# Allegro board PWM-CIRCUIT.brd
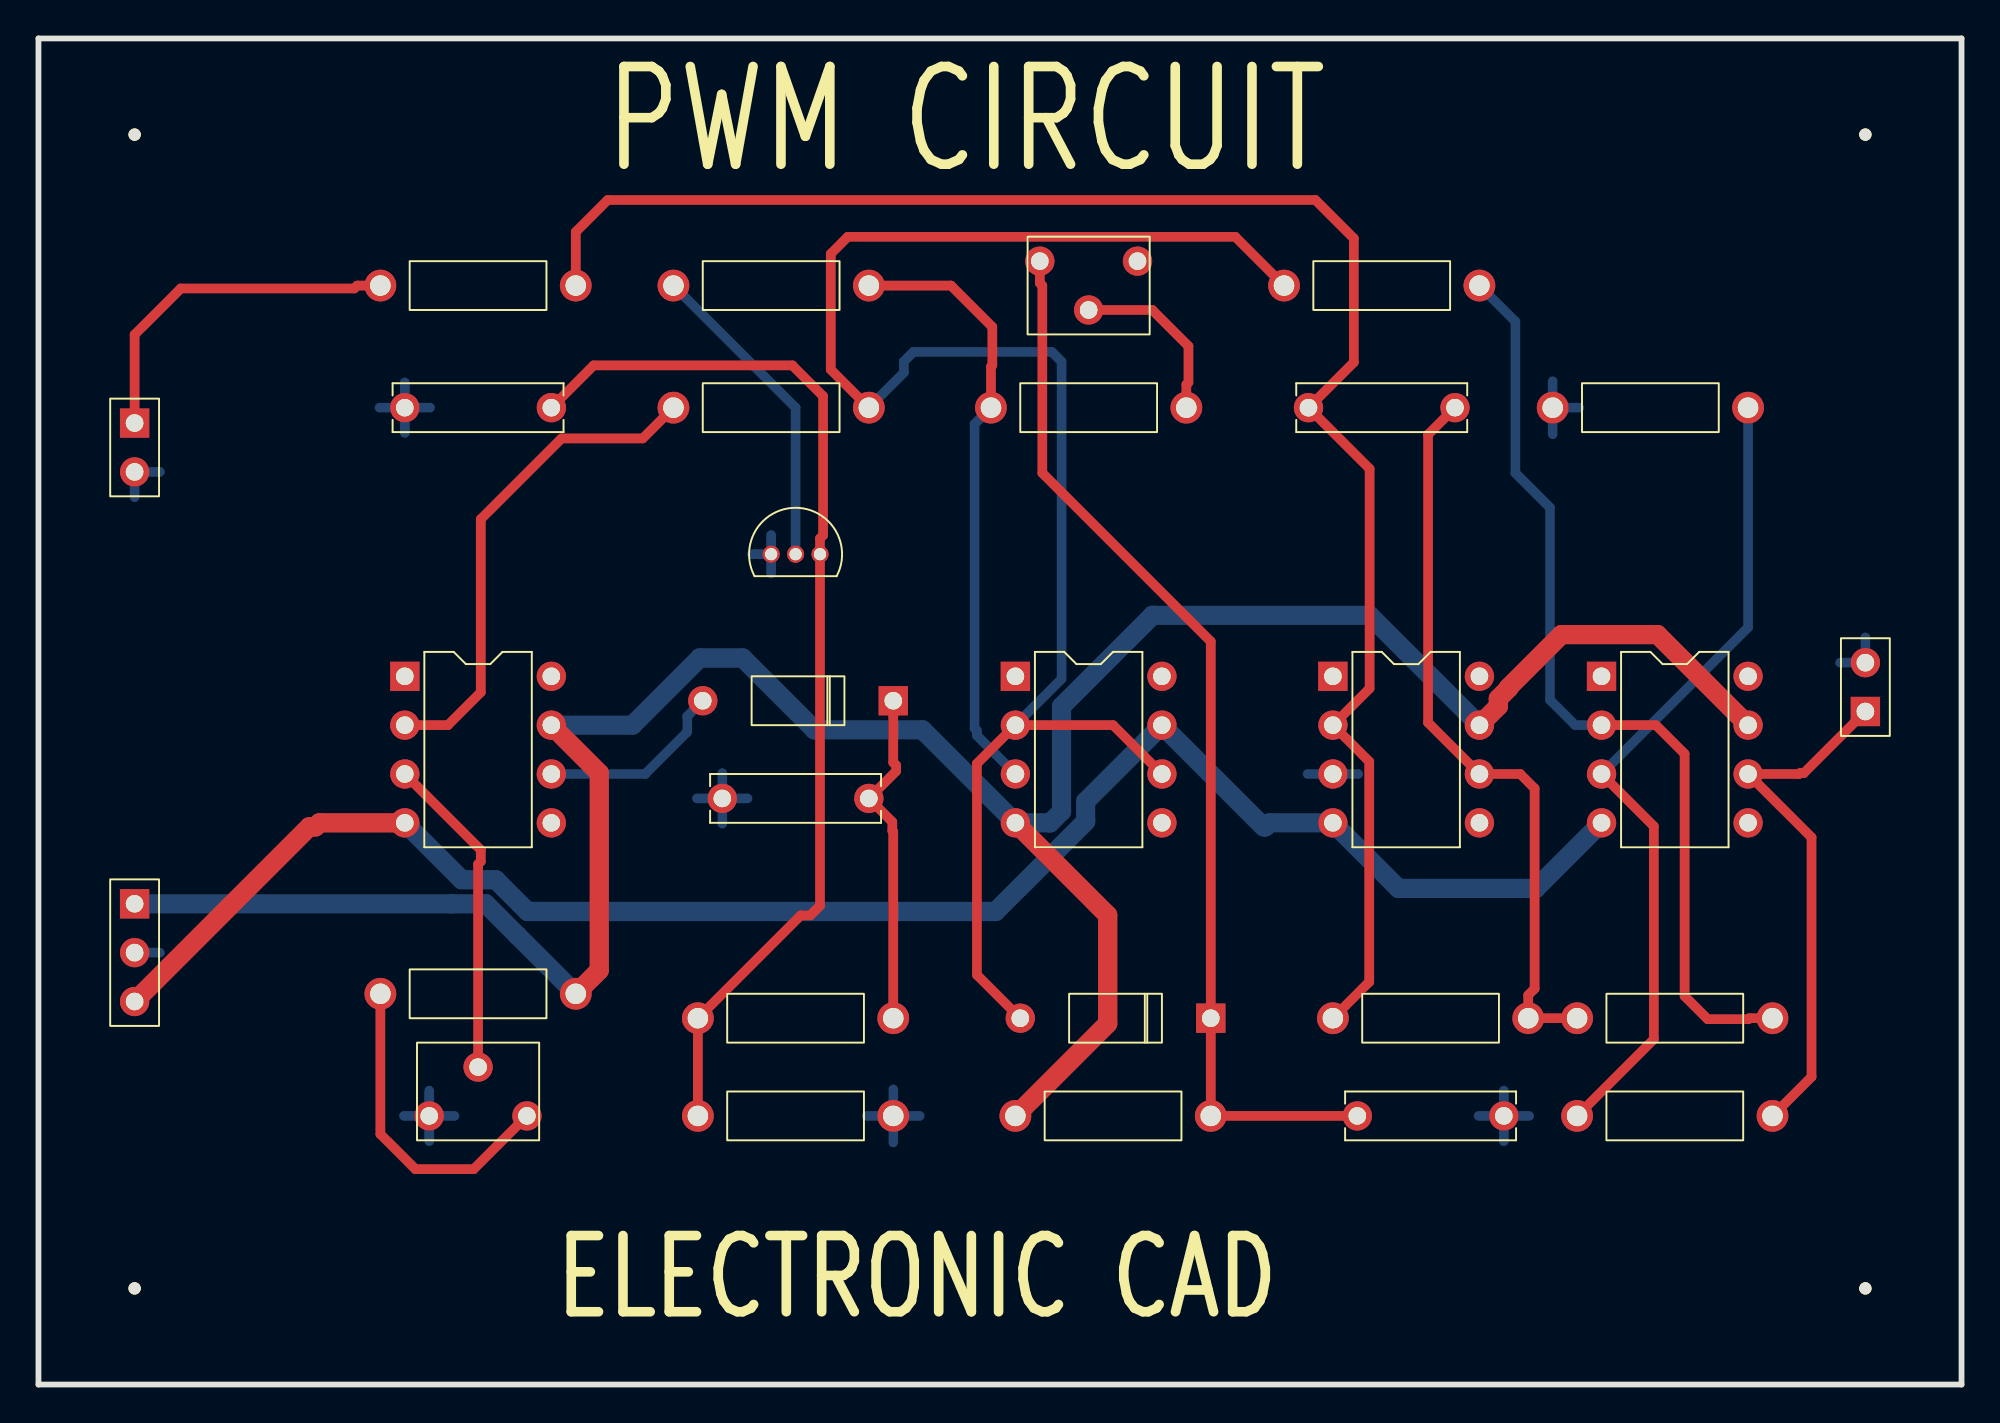
[diagram p0: board, top side]
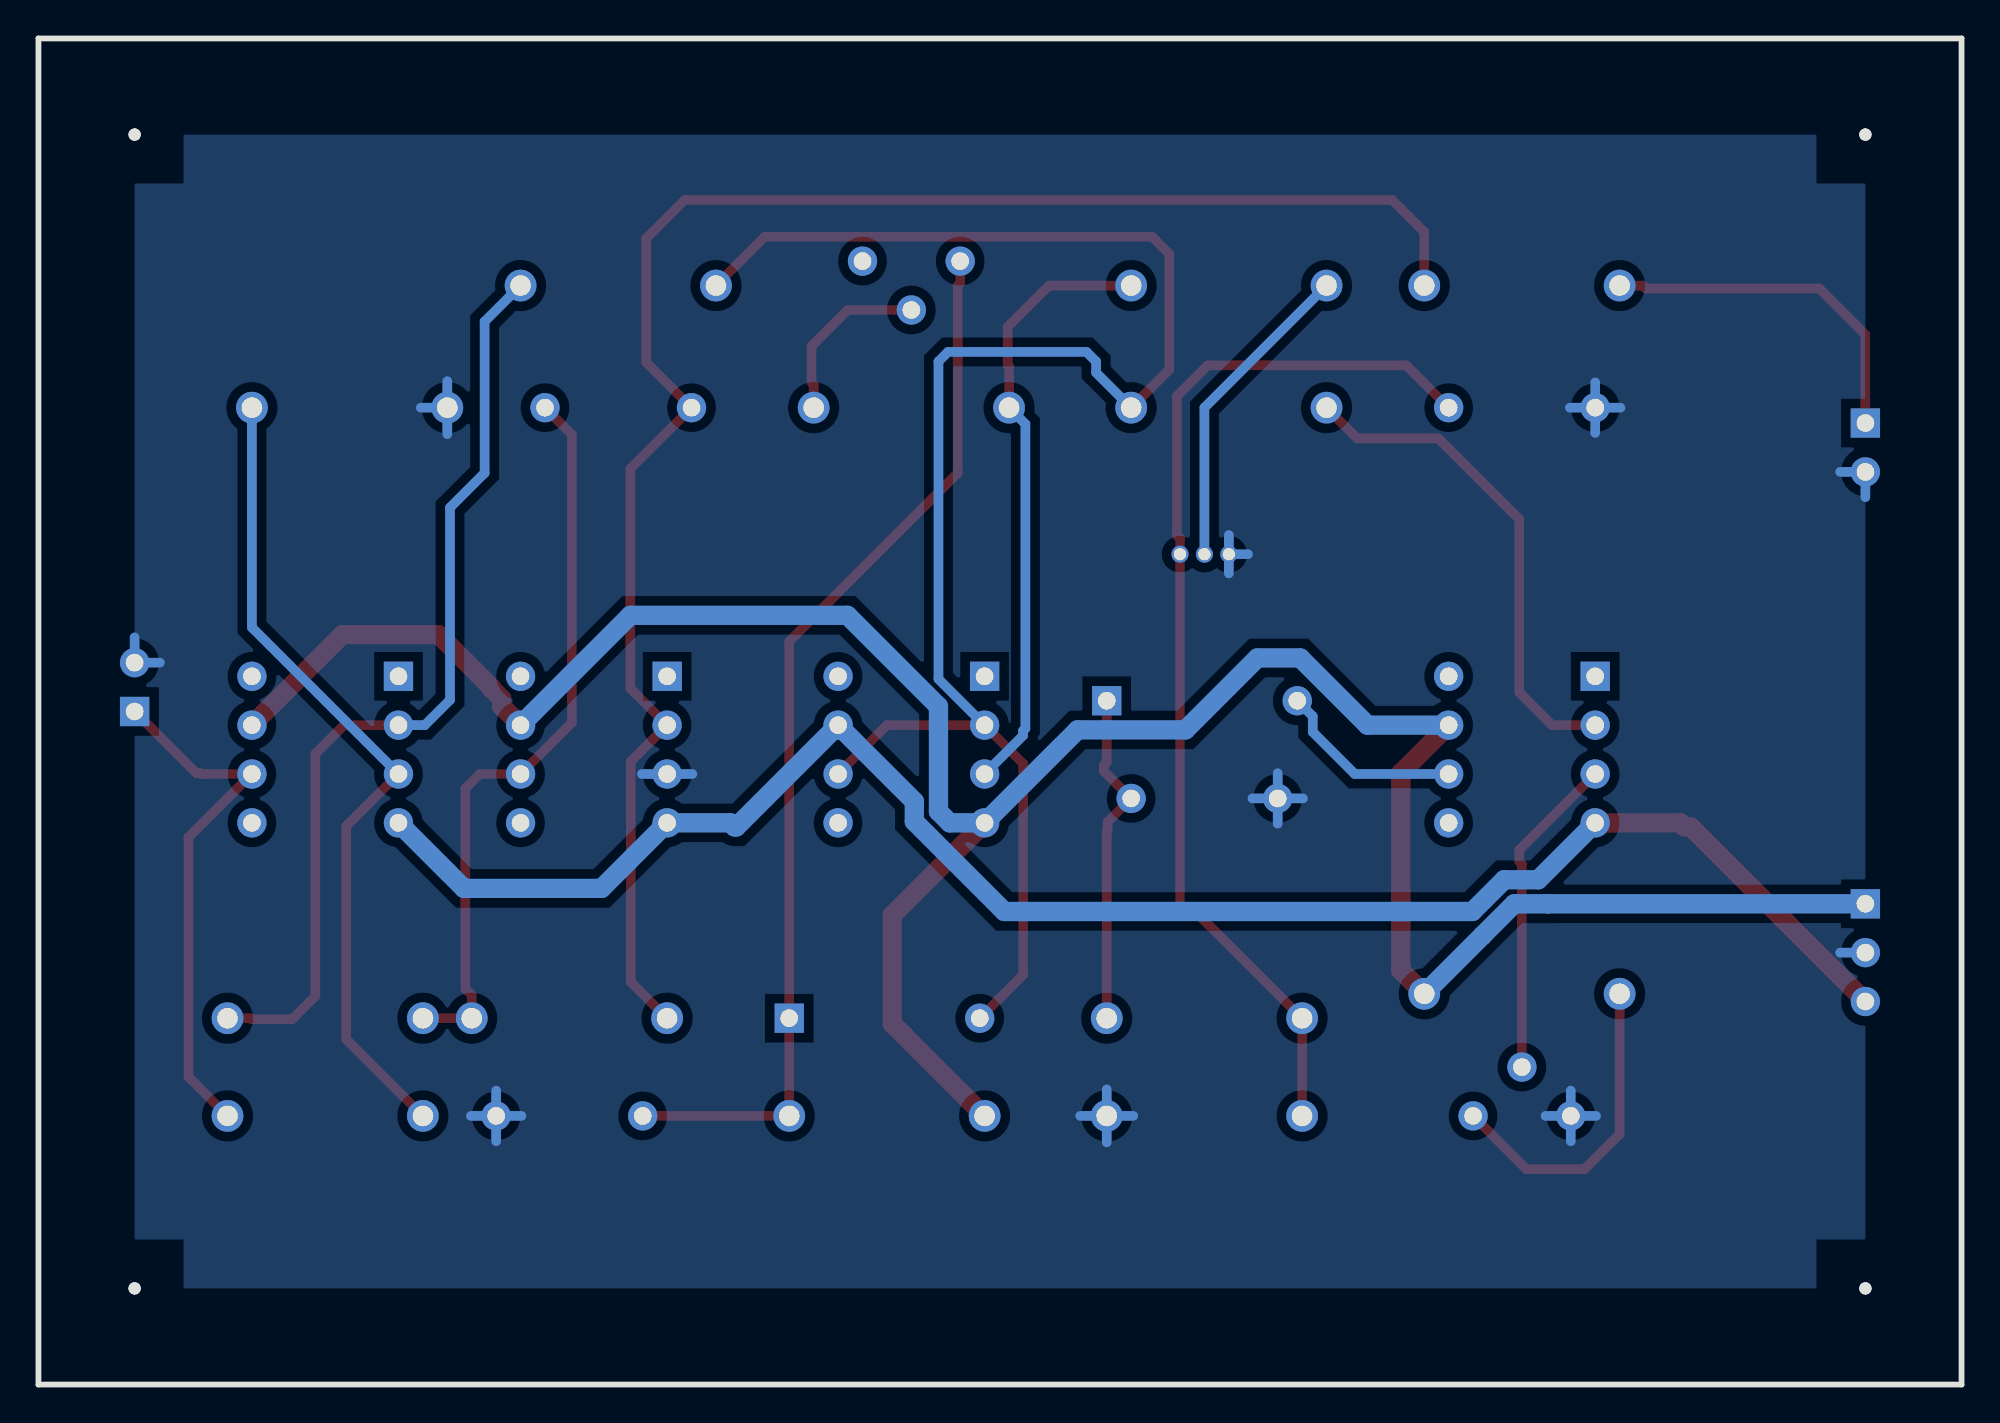
[diagram p1: board, bottom side, seen from below]

Outline 100 x 70 mm; copper layers: TOP, BOTTOM. Coordinates in mm from the lower left corner of the outline.
Outline path: 0,70 0,0 100,0 100,70 0,70

## Design rules (mm)
nets with their own width: min track width 1; nets +12V -12V GND

## Placement (name value [footprint] x y rotation side)
C1  0.001uF  [CAP300]  66.04 50.8 0 top
C2  0.001uF  [CAP300]  76.2 13.97 180 top
C3  0.0033uF  [CAP300]  19.05 50.8 0 top
C4  0.1uF  [CAP300]  35.56 30.48 0 top
D1  ZD5.1V  [DO41]  60.96 19.05 90 top
D2  1S1588  [DO41]  44.45 35.56 90 top
J1  CON2  [JUMPER2]  5 50 270 top
J2  CON2  [JUMPER2]  95 35 90 top
J3  CON3  [JUMPER3]  5 25 270 top
NOREF  -  []  95 5 90 top
NOREF#2  -  [unnamed#2]  95 5 0 top
NOREF#3  -  []  5 25 90 top
NOREF#4  -  [unnamed#2]  5 5 0 top
NOREF#5  -  []  95 65 0 top
NOREF#6  -  [unnamed#2]  5 65 0 top
NOREF#7  -  [unnamed#2]  95 65 0 top
NOREF#8  -  []  5 65 90 top
NOREF#9  -  []  5 65 0 top
NOREF#10  -  []  5 50 90 top
NOREF#11  -  []  5 5 90 top
NOREF#12  -  []  0 66.04 0 top
NOREF#13  -  []  96.52 0 90 top
NOREF#14  -  []  0 0 90 top
NOREF#15  -  []  3.81 0 90 top
NOREF#16  -  []  0 70 0 top
Q1  2SC1815  [TO92]  38.1 43.18 90 top
R1  100K  [RES400]  17.78 57.15 270 top
R2  3.3K  [RES400]  50.8 13.97 270 top
R3  1M  [RES400]  74.93 57.15 90 top
R4  10K  [RES400]  67.31 19.05 270 top
R5  10K  [RES400]  59.69 50.8 90 top
R6  1  [RES400]  33.02 57.15 270 top
R7  10K  [RES400]  33.02 50.8 270 top
R8  10K  [RES400]  90.17 19.05 90 top
R9  3.9K  [RES400]  17.78 20.32 270 top
R10  RESISTOR  [RES400]  44.45 19.05 90 top
R11  10K  [RES400]  90.17 13.97 90 top
R12  4.7K  [RES400]  34.29 13.97 270 top
R13  470  [RES400]  88.9 50.8 90 top
U1  LF356  [DIP8_3]  50.8 36.83 0 top
U2  LF356  [DIP8_3]  67.31 36.83 0 top
U3  LF356  [DIP8_3]  81.28 36.83 0 top
U4  LF356  [DIP8_3]  19.05 36.83 0 top
VR1  1M  [RESADJ]  52.07 58.42 90 top
VR2  10K  [RESADJ]  25.4 13.97 270 top

## Library data of the parts
C1-C4 = CAP NP: Tolerance: ***; User Part Number: ***
D1 = DIODE ZENER
D2 = DIODE
J1 J2 = CON2: User Part Number: ***
J3 = CON3: User Part Number: ***
Q1 = NPN ECB
R1-R13 = RESISTOR: Tolerance: ***; User Part Number: ***
U1 = LF356_1: Tolerance: ***; User Part Number: ***
U2-U4 = LF356_0: Tolerance: ***; User Part Number: ***
VR1 = RESISTOR VAR 2: Tolerance: ***; User Part Number: ***
VR2 = RESISTOR VAR: Tolerance: ***; User Part Number: ***

## Footprints (pads in the part's own frame, mm; a bottom-side part is the same pattern mirrored in y, then rotated)
CAP300
  round 1.524 hole 0.914: 1(0,0) 2(7.62,0)
DIP8_3
  rect 1.524x1.524 hole 0.914: 1(0,0)
  round 1.524 hole 0.914: 2(0,-2.54) 3(0,-5.08) 4(0,-7.62) 5(7.62,-7.62) 6(7.62,-5.08) 7(7.62,-2.54) 8(7.62,0)
DO41
  rect 1.524x1.524 hole 0.914: 1(0,0)
  round 1.524 hole 0.914: 2(0,9.906)
JUMPER2
  rect 1.524x1.524 hole 0.914: 1(0,0)
  round 1.524 hole 0.914: 2(2.54,0)
JUMPER3
  rect 1.524x1.524 hole 0.914: 1(0,0)
  round 1.524 hole 0.914: 2(2.54,0) 3(5.08,0)
RES400
  round 1.651 hole 1.067: 1(0,0) 2(0,10.16)
RESADJ
  round 1.524 hole 0.914: 1(0,0) 2(-2.54,-2.54) 3(0,-5.08)
TO92
  round 0.889 hole 0.635: 1(0,0) 2(0,-1.27) 3(0,-2.54)
unnamed#2
  round 0.635 hole 3.175 unplated: (0,0)

## Nets
+12V: J3.1 R2.1 R9.2 U1.4(V-) U2.7(V+) U3.7(V+) U4.7(V+)
-12V: J3.3 U1.7(V+) U2.4(V-) U3.4(V-) U4.4(V-)
GND: C2.1 C3.1 C4.1 J1.2 J2.2 J3.2 Q1.1(E) R12.2 R13.2 U2.3(+IN) VR2.3(B)
A1: D1.2(ANODE) R3.2 R7.2 U1.2(-IN) U1.6(OUT)
B1: C1.1 R1.2 R4.1 U2.2(-IN)
OUT: J2.1 R11.1 U3.6(OUT)
N00905: U4.3(+IN) VR2.2(WIPER)
N00909: R9.1 VR2.1(A)
N01168: J1.1 R1.1
N01210: R7.1 U4.2(-IN)
N01226: D2.2(A) U4.6(OUT)
N01236: C4.2 D2.1(K) R10.1
N01273: C3.2 Q1.3(B) R10.2 R12.1
N01367: R11.2 R13.1 U3.3(+IN)
N01391: C2.2 D1.1(CATHODE) R2.2 VR1.1
N01415: R5.2 R6.2 U1.3(+IN)
N01426: R3.1 R8.1 U3.2(-IN)
N01469: R5.1 VR1.2
N01710: C1.2 R4.2 R8.2 U2.6(OUT)
N02797: Q1.2(C) R6.1

Pads without a net: U1 1 5 8; U2 1 5 8; U3 1 5 8; U4 1 5 8; VR1 3

## Routing (per net, layer and track width the routed paths; a pad name or vN(x,y) marks a point on that pad's centre or on a via; arc(x,y) is an arc through that point)
+12V: length 141
  TOP w1: U3.7 84.19,39 79.2,39 76.45,36.25 76.45,36.2 75.91,35.67 75.91,35.27 U2.7 ; R9.2 29.16,21.54 29.16,31.8 U4.7 ; U1.4 55.6,24.41 55.6,18.77 R2.1
  BOTTOM w1: U2.7 69.22,40 57.93,40 53.2,35.27 53.2,29.8 52.61,29.21 U1.4 45.97,34.04 40.36,34.04 36.62,37.78 34.38,37.78 30.89,34.29 U4.7 ; R9.2 24.91,23.35 24.91,23.35 23.26,25 21.49,25 21.49,25 J3.1
-12V: length 91.8
  TOP w1: U4.4 14.61,29.21 14.4,29 14.08,29 J3.3
  BOTTOM w1: U4.4 22.01,26.25 23.78,26.25 25.43,24.6 49.77,24.6 54.45,29.28 54.45,30.32 U1.7 63.71,29 63.8,29 64.01,29.21 U2.4 70.72,25.8 77.87,25.8 U3.4
GND: length 42.9
  BOTTOM w0.5: 17.73,50.8 C3.1 ; C3.1 20.36,50.8 ; C3.1 19.05,52.12 ; C3.1 19.05,49.48 ; 43.07,13.97 R12.2 ; R12.2 45.83,13.97 ; R12.2 44.45,15.35 ; R12.2 44.45,12.59 ; 95,38.85 J2.2 93.69,37.54 ; 6.32,47.46 J1.2 5,46.15 ; VR2.3 20.32,15.29 ; VR2.3 20.32,12.65 ; VR2.3 19,13.97 ; VR2.3 21.64,13.97 ; C2.1 76.2,15.29 ; C2.1 74.89,13.97 ; C2.1 77.52,13.97 ; C2.1 76.2,12.65 ; Q1.1 38.1,44.18 ; Q1.1 38.1,42.18 ; Q1.1 37.1,43.18 ; C4.1 35.56,31.8 ; C4.1 35.56,29.16 ; C4.1 34.24,30.48 ; C4.1 36.88,30.48 ; R13.2 80.12,50.8 ; R13.2 78.74,52.18 ; R13.2 78.74,49.42 ; 68.62,31.75 U2.3 66,31.75 ; J3.2 6.32,22.46
A1: length 91.2
  TOP w0.5: D1.2 48.8,21.3 48.8,32.29 U1.2 55.88,34.29 U1.6 ; R7.2 41.2,52.78 41.2,58.8 42.09,59.69 62.23,59.69 R3.2
  BOTTOM w0.5: U1.2 53.2,36.69 53.2,53.2 52.7,53.7 45.5,53.7 45,53.2 45,52.62 R7.2
B1: length 90
  TOP w0.5: R1.2 27.94,59.94 29.6,61.6 66.4,61.6 68.4,59.6 68.4,53.16 C1.1 69.22,47.62 69.22,36.2 U2.2 69.2,32.4 69.2,20.94 R4.1
OUT: length 27.4
  TOP w0.5: R11.1 92.2,16 92.2,28.45 U3.6 91.55,31.75 91.6,31.8 91.8,31.8 J2.1
N00905: length 16.9
  TOP w0.5: VR2.2 22.86,27.06 23,27.2 23,27.8 U4.3
N00909: length 16.8
  TOP w0.5: VR2.1 22.63,11.2 19.6,11.2 17.78,13.02 R9.1
N01168: length 18.4
  TOP w0.5: R1.1 16.58,57.15 16.43,57 7.4,57 5,54.6 J1.1
N01210: length 26.1
  TOP w0.5: U4.2 21.29,34.29 23,36 23,45 27.2,49.2 31.42,49.2 R7.1
N01226: length 9.9
  BOTTOM w0.5: U4.6 31.55,31.75 33.74,33.94 33.74,34.75 D2.2
N01236: length 17.7
  TOP w0.5: D2.1 44.45,32.35 44.6,32.2 44.6,31.9 C4.2 44.4,29.26 44.4,28.8 44.45,28.75 R10.1
N01273: length 56.1
  TOP w0.5: R12.1 R10.2 39.64,24.4 40.14,24.4 40.64,24.9 Q1.3 40.64,44 40.8,44.16 40.8,51.4 39.2,53 28.87,53 C3.2
N01367: length 42.8
  TOP w0.5: U3.3 84,29.03 84,17.96 R11.2
  BOTTOM w0.5: U3.3 88.9,39.37 R13.1
N01391: length 55.8
  TOP w0.5: VR1.1 52.07,57.28 52.2,57.15 52.2,47.4 60.96,38.64 D1.1 R2.2 C2.2
N01415: length 31.8
  TOP w0.5: R5.2 49.53,52.93 49.6,53 49.6,55 47.45,57.15 R6.2
  BOTTOM w0.5: R5.2 48.68,49.95 48.68,34.12 48.8,34 48.8,33.75 U1.3
N01426: length 48.9
  TOP w0.5: U3.2 84.11,34.29 85.6,32.8 85.6,20.2 86.8,19 88.92,19 88.97,19.05 R8.1
  BOTTOM w0.5: R3.1 76.8,55.28 76.8,47.4 78.6,45.6 78.6,35.6 79.91,34.29 U3.2
N01469: length 9.2
  TOP w0.5: R5.1 59.69,52 59.8,52.11 59.8,54 57.92,55.88 VR1.2
N01710: length 38.5
  TOP w0.5: R8.2 R4.2 77.47,20.25 77.8,20.58 77.8,31 77.05,31.75 U2.6 72.26,34.42 72.26,49.4 C1.2
N02797: length 16.6
  BOTTOM w0.5: R6.1 39.37,50.8 Q1.2

## Copper pours and planes (outline as drawn; the poured copper is in the pictures)
GND on BOTTOM: 5,5 5,65 95,65 95,5 ; 2 cut-outs

## Text on the board
Ref Des/Silkscreen Top: ELECTRONIC CAD | PWM CIRCUIT
DIMENSION: FIGURE | SIZE | 0.635 | 0.914 | 1.067 | 3.175 | DRILL CHART: TOP to BOTTOM | ALL UNITS ARE IN MILLIMETERS | PLATED | NON-PLATED | QTY | 3 | 57 | 26 | 4
